# Altium PCB iTag3_sensors.PcbDoc
Units mil, origin at the board's own origin, x right, y up, seen from the top; angles counter-clockwise.
Board outline 1170 x 680 mil, 2 copper layers (Top Layer, Bottom Layer); 13 components, 10 nets, 69 pads, 0 vias.
Unrouted connection lines stored in the file: 42.
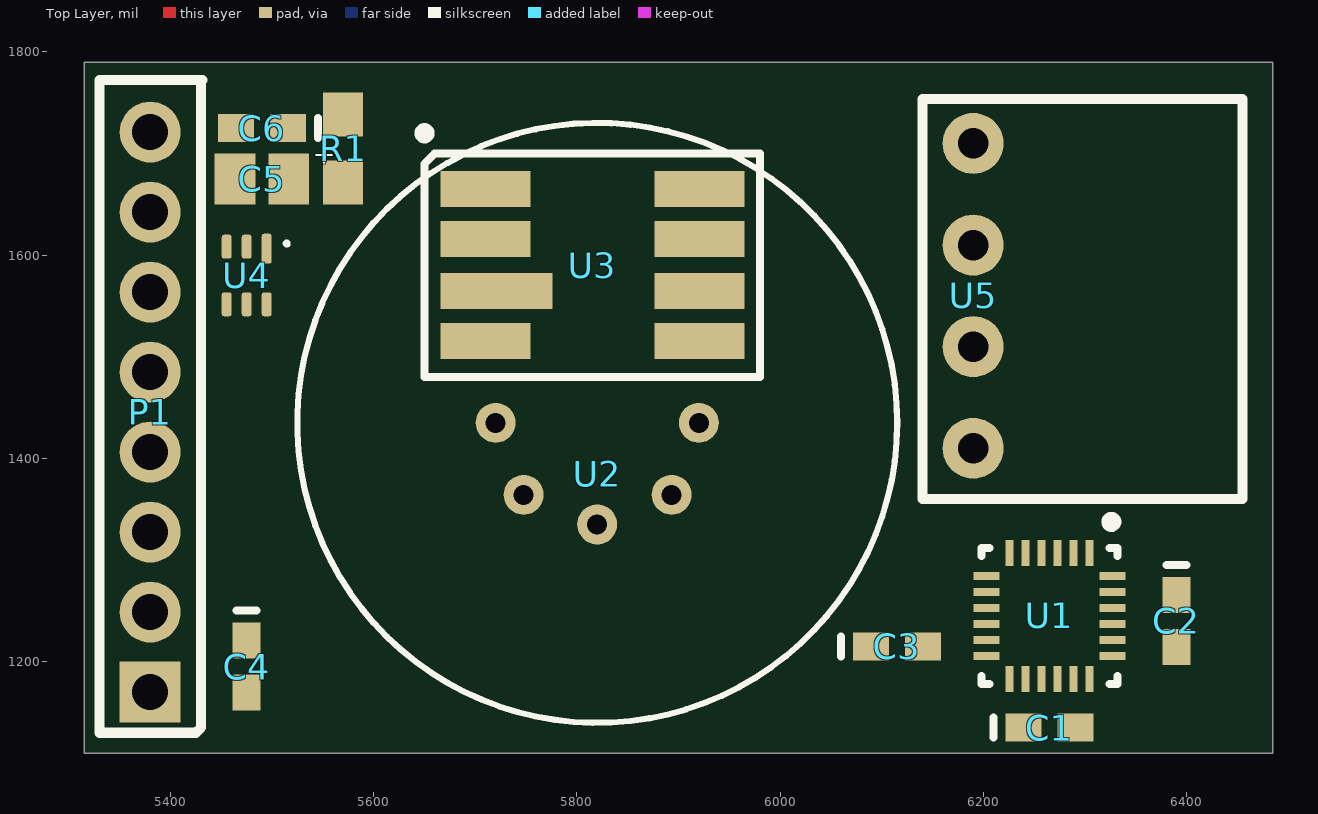
[diagram p0: Top Layer view]
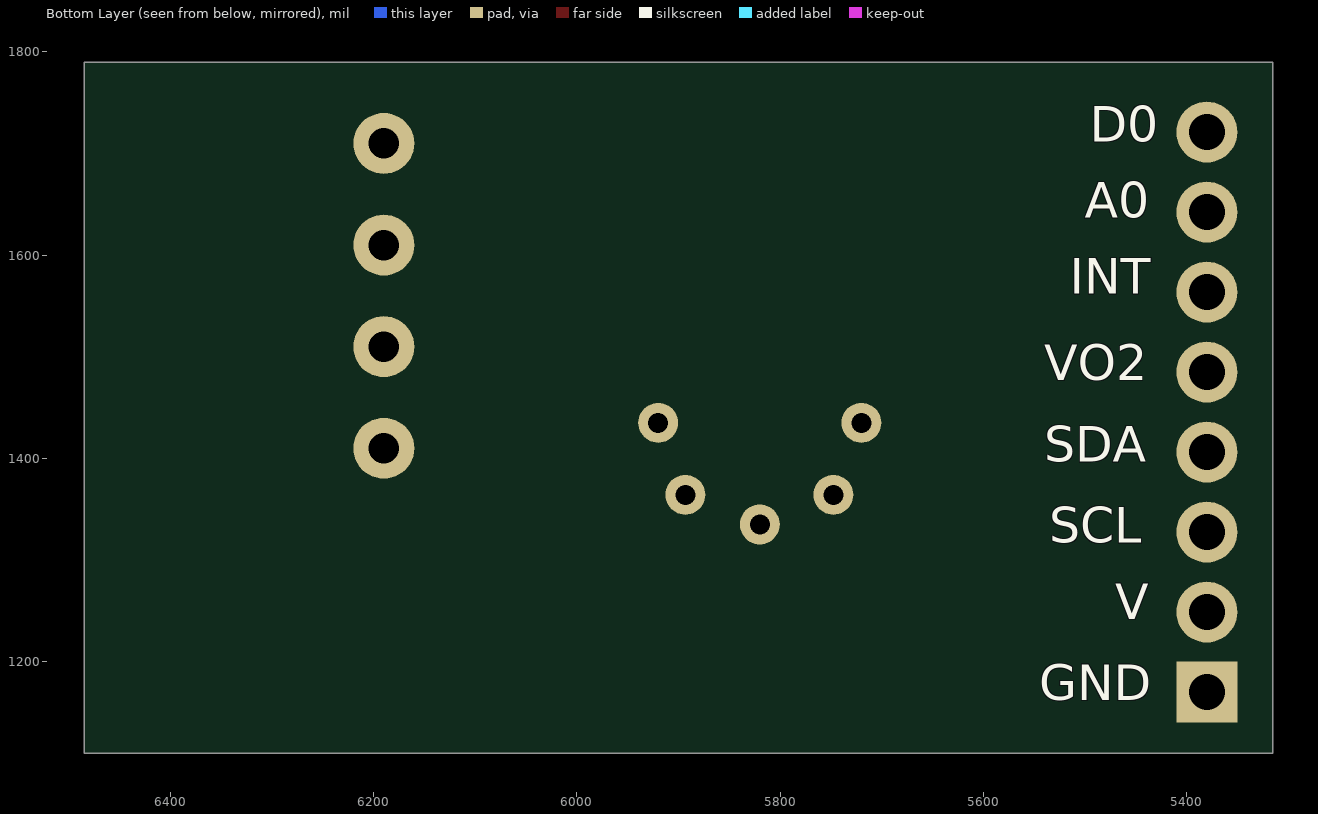
[diagram p1: Bottom Layer view, seen from below]

## Layer stack, top to bottom
Top Solder: solder mask 0.4, Solder Resist, Dk 3.5
Top Layer: signal copper 1.4
Dielectric 1: dielectric 12.6, FR-4, Dk 4.8
Bottom Layer: signal copper 1.4
Bottom Solder: solder mask 0.4, Solder Resist, Dk 3.5

## Board outline
5315,1110 6485,1110 6485,1790 5315,1790

## Design rules (kind name [scope] priority, off if disabled: settings)
Clearance [All] p1: gap=10
PolygonConnect [All] p1: connectstyle=Relief reliefconductorwidth=10 reliefentries=4 polygonreliefangle="90 Angle" airgapwidth=10
RoutingVias [All] p1: holewidth=28 width=50 viastyle="Through Hole" minholewidth=28 minwidth=50 maxholewidth=28 maxwidth=50
SolderMaskExpansion [All] p1: expansion=4
Width [All] p1: maxlimit=10 minlimit=10 preferedwidth=10
29 further rules are at their usual default settings.

## Components (designator, comment, footprint, x,y, rotation, side; value= is the part's Value field where it differs from the comment)
C1 "C0402" 0402 6265,1135 r0 top
C2 "C0402" 0402 6390,1240 r270 top
C3 "C0402" 0402 6115,1215 r0 top
C4 "C0402" 0402 5475,1195 r270 top
C5 "0805" Tant0805 5490,1675 r0 top
C6 "C0402" 0402 5490,1725 r180 top
P1 "HDR_8x1_2mm" HDR_8x1_2mm 5380,1170 r0 top
R1 "100x" 3-0603 5570,1705 r270 top
U1 "MPU9250" MPU6500 6265,1245 r270 top
U2 "Keller7LD" Keller7LD 5720,1435 r0 top
U3 "MS5803_Press" MS5803_Press 5710,1665 r0 top
U4 "RGB light" ODFN 5475,1580 r270 top
U5 "PRESENS O2 CUBE" PRESENS_O2 6140,1360 r90 top

## Footprints (in the part's own frame and the unit in brackets; to place one, negate y for a bottom-side part, rotate by r counter-clockwise, add the part's x,y. Pads: shape width x height; smd on the part's side, far side on the other; paste and mask are expansions set on the pad)
3-0603 [mm] "Chip Resistor; Body 1.6 x 0.9 mm (LxW typ)"
  rect 1.1x1 smd: 1(-0.85,0) 2(0.85,0)
0402 [mm] "Chip Capacitor; Body 1.0 x 0.5 mm (LxW typ)"
  rect 0.9x0.7 smd: 1(-0.65,0) 2(0.65,0)
  silkscreen extent -1.4,-0.25 -1.4,0.25
HDR_8x1_2mm [mil]
  rect 60x60 hole 35.43: 1(0,0.04)
  round 60 hole 35.43: 2(0,78.78) 3(0,157.52) 4(0,236.26) 5(0,315) 6(0,393.7) 7(0,472.44) 8(0,551.18)
  silkscreen extent -50,-40 51,602
Keller7LD [mm]
  round 1 hole 0.5: 1(5.08,0) 2(4.4,-1.8) 3(2.54,-2.54) 4(0.7,-1.8) 5(0,0)
  silkscreen extent -4.96,-7.5 10.04,7.5, body extent -4.94,-7.49 10,7.49, height 5.25
MPU6500 [mm] "QFN, 24-Leads, Body 3.00x3.00mm, Pitch 0.40mm, Thermal Pad 1.54x1.54mm, IPC Medium Density"
  rect 0.65x0.2 smd: 1(-1.575,1) 2(-1.575,0.6) 3(-1.575,0.2) 4(-1.575,-0.2) 5(-1.575,-0.6) 6(-1.575,-1) 13(1.575,-1) 14(1.575,-0.6) 15(1.575,-0.2) 16(1.575,0.2) 17(1.575,0.6) 18(1.575,1)
  rect 0.2x0.65 smd: 7(-1,-1.575) 8(-0.6,-1.575) 9(-0.2,-1.575) 10(0.2,-1.575) 11(0.6,-1.575) 12(1,-1.575) 19(1,1.575) 20(0.6,1.575) 21(0.2,1.575) 22(-0.2,1.575) 23(-0.6,1.575) 24(-1,1.575)
  silkscreen extent -2.47,-1.7 1.7,1.7, body extent -1.85,-1.25 1.25,1.85, height 0.9
MS5803_Press [mm]
  rect 2.25x0.9 smd: 1(0,0) 2(0,-1.25) 4(0,-3.8) 5(5.35,-3.8) 6(5.35,-2.55) 7(5.35,-1.25) 8(5.35,0)
  rect 2.8x0.9 smd: 3(0.275,-2.55)
  silkscreen extent -1.65,-4.7 6.86,1.52
ODFN [mm]
  rrect50% 0.75x0.25 smd: 1(-0.67,0.5)
  rrect50% 0.6x0.25 smd: 2(-0.72,0) 3(-0.72,-0.5) 4(0.72,-0.5) 5(0.72,0) 6(0.72,0.5)
  silkscreen extent -0.85,0.95 -0.75,1.05, body extent -0.82,-0.82 0.82,0.82, height 0.7
PRESENS_O2 [mil]
  round 60 hole 30: 1(50,-50) 2(150,-50) 3(250,-50) 4(350,-50)
  silkscreen extent 0,-315 394,0, body extent 0,-315 394,0, height 285
Tant0805 [mil]
  rect 40x50 smd: 1(-26.5,0) 2(26.5,0)

## Part data
C1 C2 C3 C4 C6: "Ceramic Chip Capacitor - Standard"
C5: library part Tant0805
R1: library part ERJ3RK, "Precision Thick Film Chip Resistor, 10 Ohm to 1M Ohm Range, 1% and 0.5% Tolerance, 0603 Size, 0.063 W"
U1: library part MPU-9250, "Invensense"
U2: library part "Keller 7LD", "Keller Pressure/Temp"
U4: library part ISL29125, "RGB light sensor"
U5: library part PRESENS_O2

## Nets (pads, with @x,y where several pads share a name; then routed paths per layer and width w, separated by ;. In a path a pad name is that pad's centre, name@x,y a point inside that pad or via, vN(x,y) a via of type N, cw(c..) or ccw(c..) an arc to the next point about the centre after c; other vN are vias at no path point)
A0: P1.7
D0: P1.8
GND: C1.2 C2.2 C3.1 C4.2 C5.1 C6.2 P1.1 U1.9 U1.11 U1.18 U1.20 U2.5 U3.2 U3.3 U4.3 U5.1
IMU_INT: P1.6 U1.12
NetC3_2: C3.2 U1.10
NetC5_2: C5.2 C6.1 R1.2 U4.1
O2POW: P1.5 U5.2
SCL: P1.3 U1.23 U2.4 U3.1 U4.6 U5.3
SDA: P1.4 U1.24 U2.2 U3.7 U4.4 U5.4
VCC: C1.1 C2.1 C4.1 P1.2 R1.1 U1.1 U1.8 U1.13 U1.22 U2.3 U3.5 U3.6
pads on no net: U1.2 U1.3 U1.4 U1.5 U1.6 U1.7 U1.14 U1.15 U1.16 U1.17 U1.19 U1.21 U2.1 U3.4 U3.8 U4.2 U4.5

## Silkscreen, mask and mechanical layers (free items; w line width, h text height)
Bottom Overlay:
  text "D0" at 5495,1700 h60
  text "A0" at 5500,1625 h60
  text "INT" at 5515,1550 h60
  text "VO2" at 5540,1465 h60
  text "SDA" at 5540,1385 h60
  text "SCL" at 5535,1305 h60
  text "V" at 5470,1230 h60
  text "GND" at 5545,1150 h60
Mechanical 1:
  the board outline again, w10

## Text inside footprints (layer, text, board x,y; h text height)
C5: Top Overlay "+" at 5540,1690 h19.68